# Altium PCB Sobel_FPGA_Block.PcbDoc
Units mil, origin at the board's own origin, x right, y up, seen from the top; angles counter-clockwise.
Board outline 6000 x 4000 mil, 6 copper layers (Top Layer, GND Plane, Power Plane, Inner Signal, GND Plane 2, Bottom Layer), stack 30.065 mil thick; 109 components, 53 nets, 617 pads, 0 vias.
Unrouted connection lines stored in the file: 370.
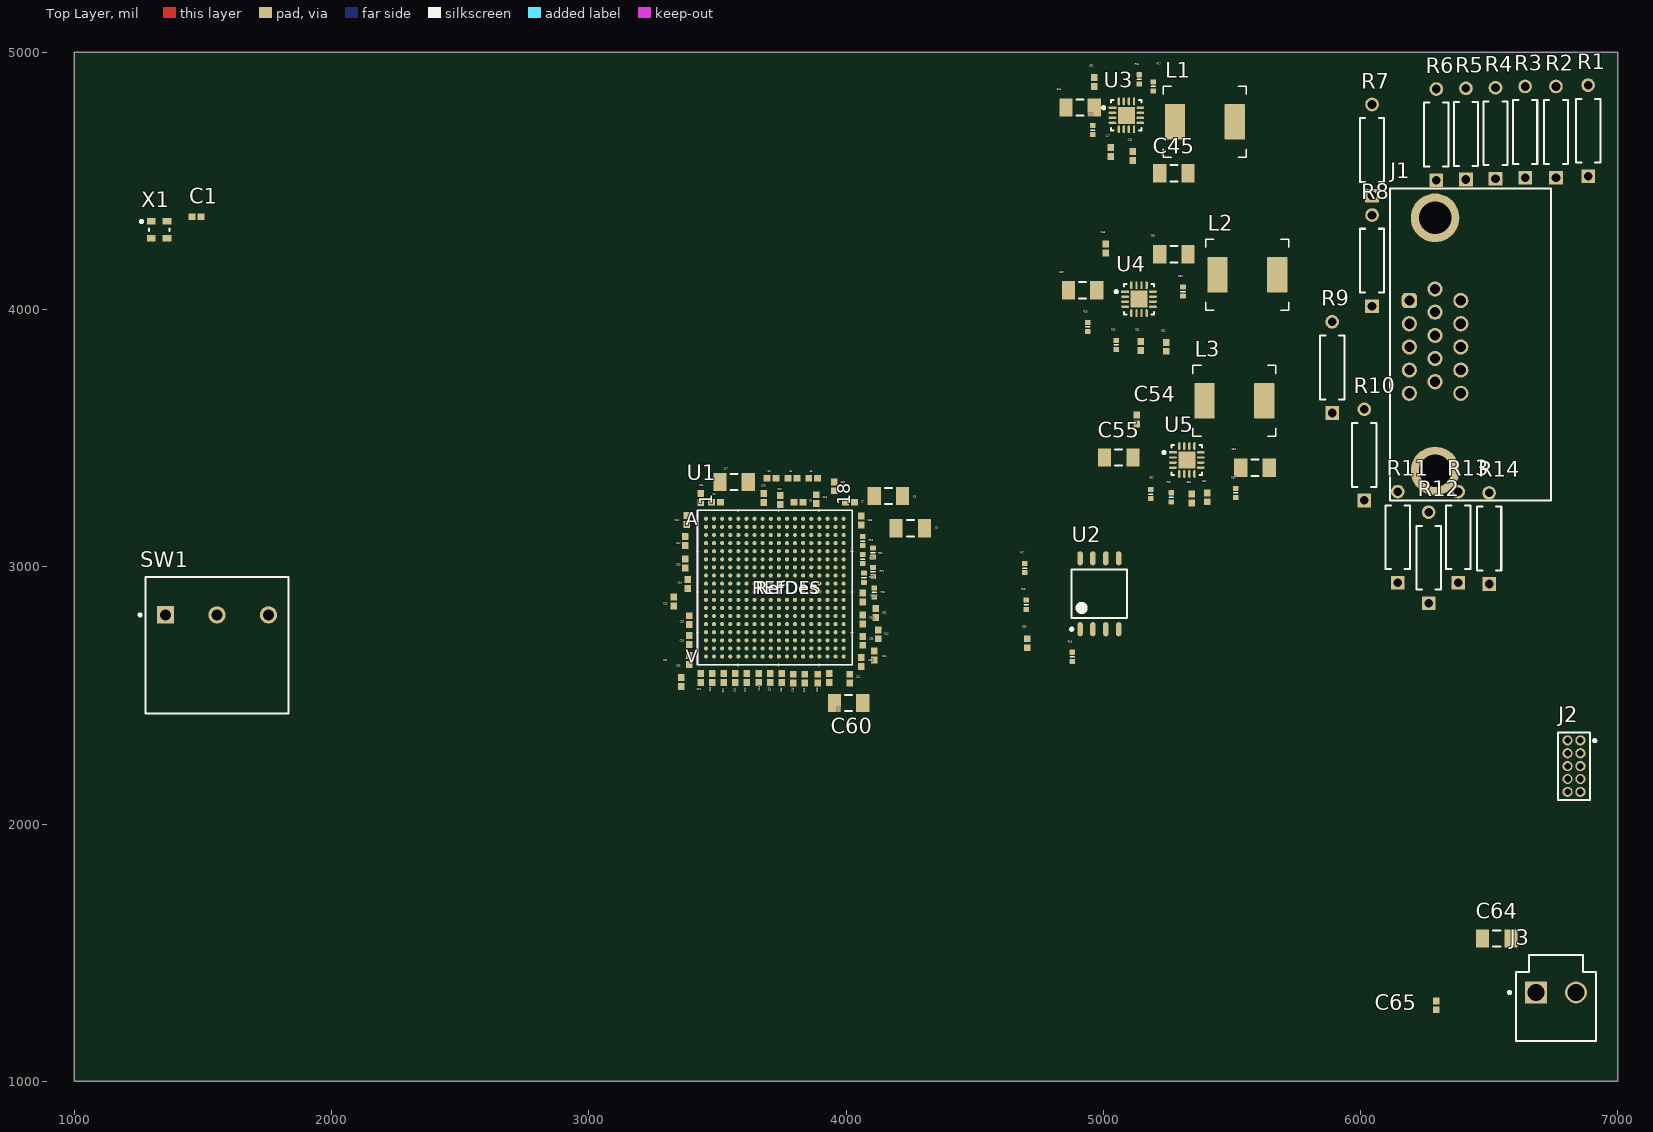
[diagram p0: Top Layer view]
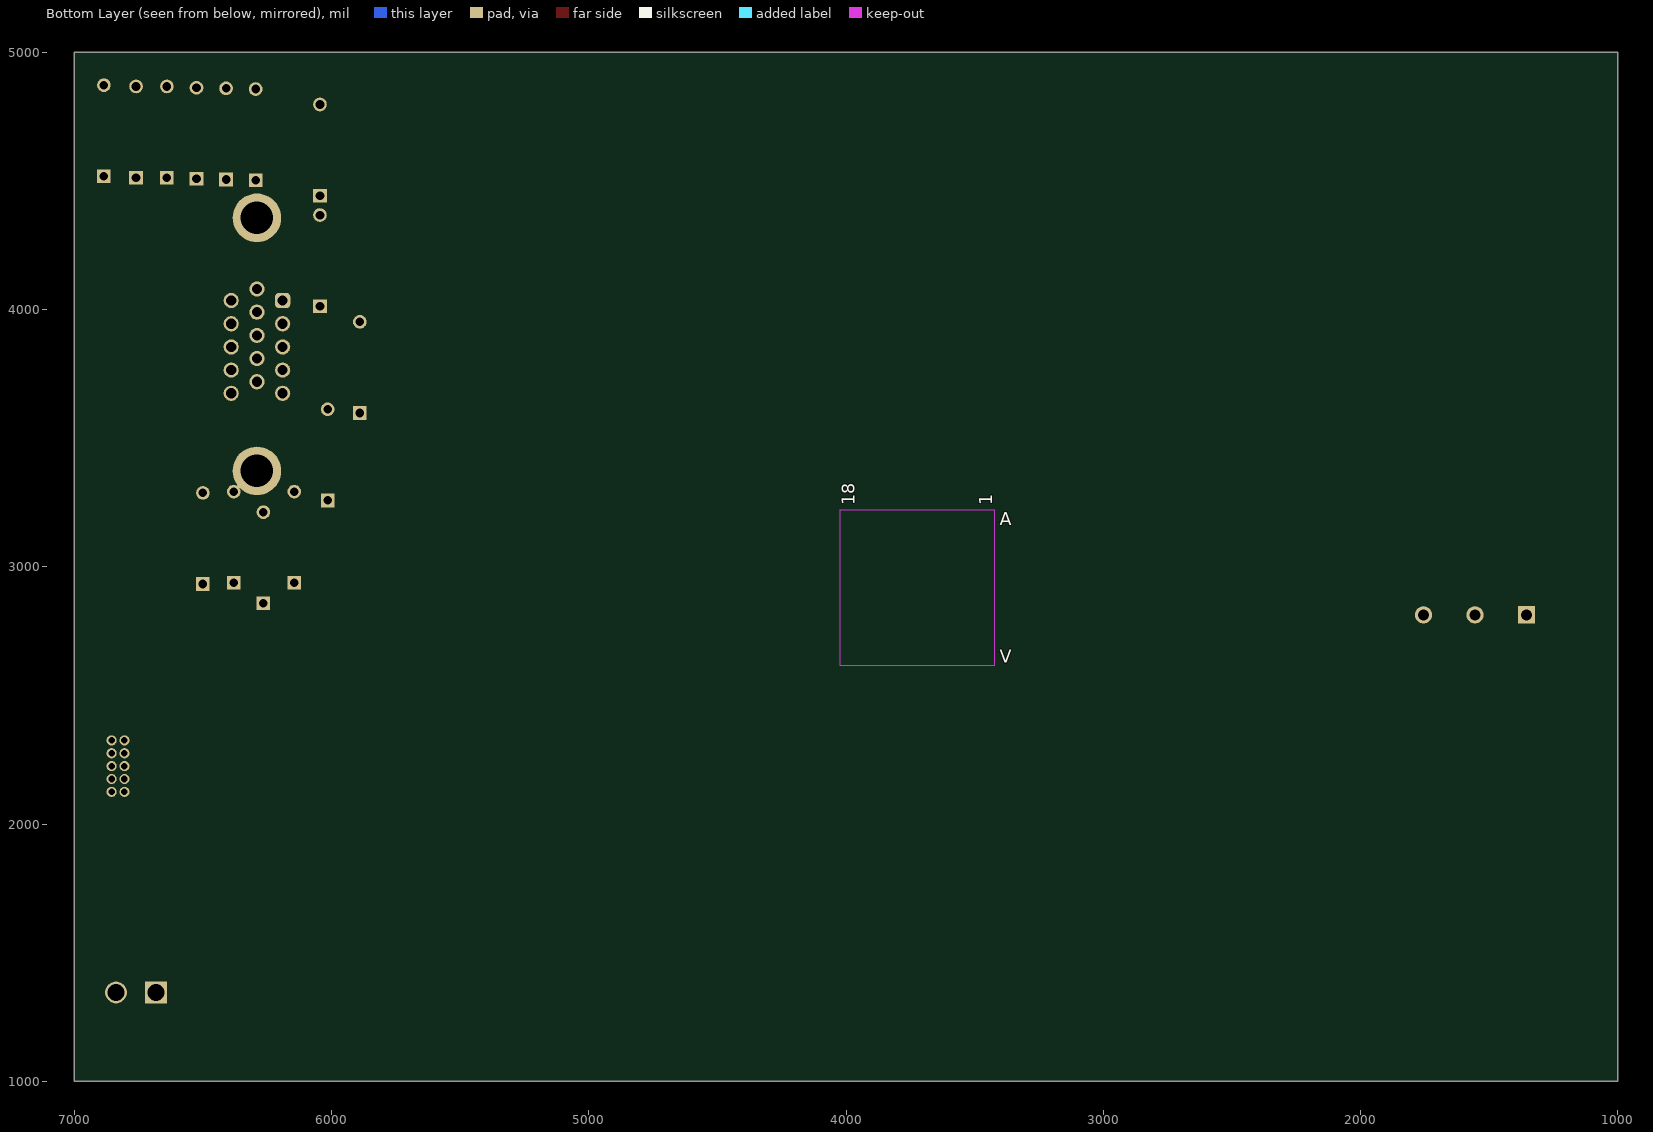
[diagram p1: Bottom Layer view, seen from below]
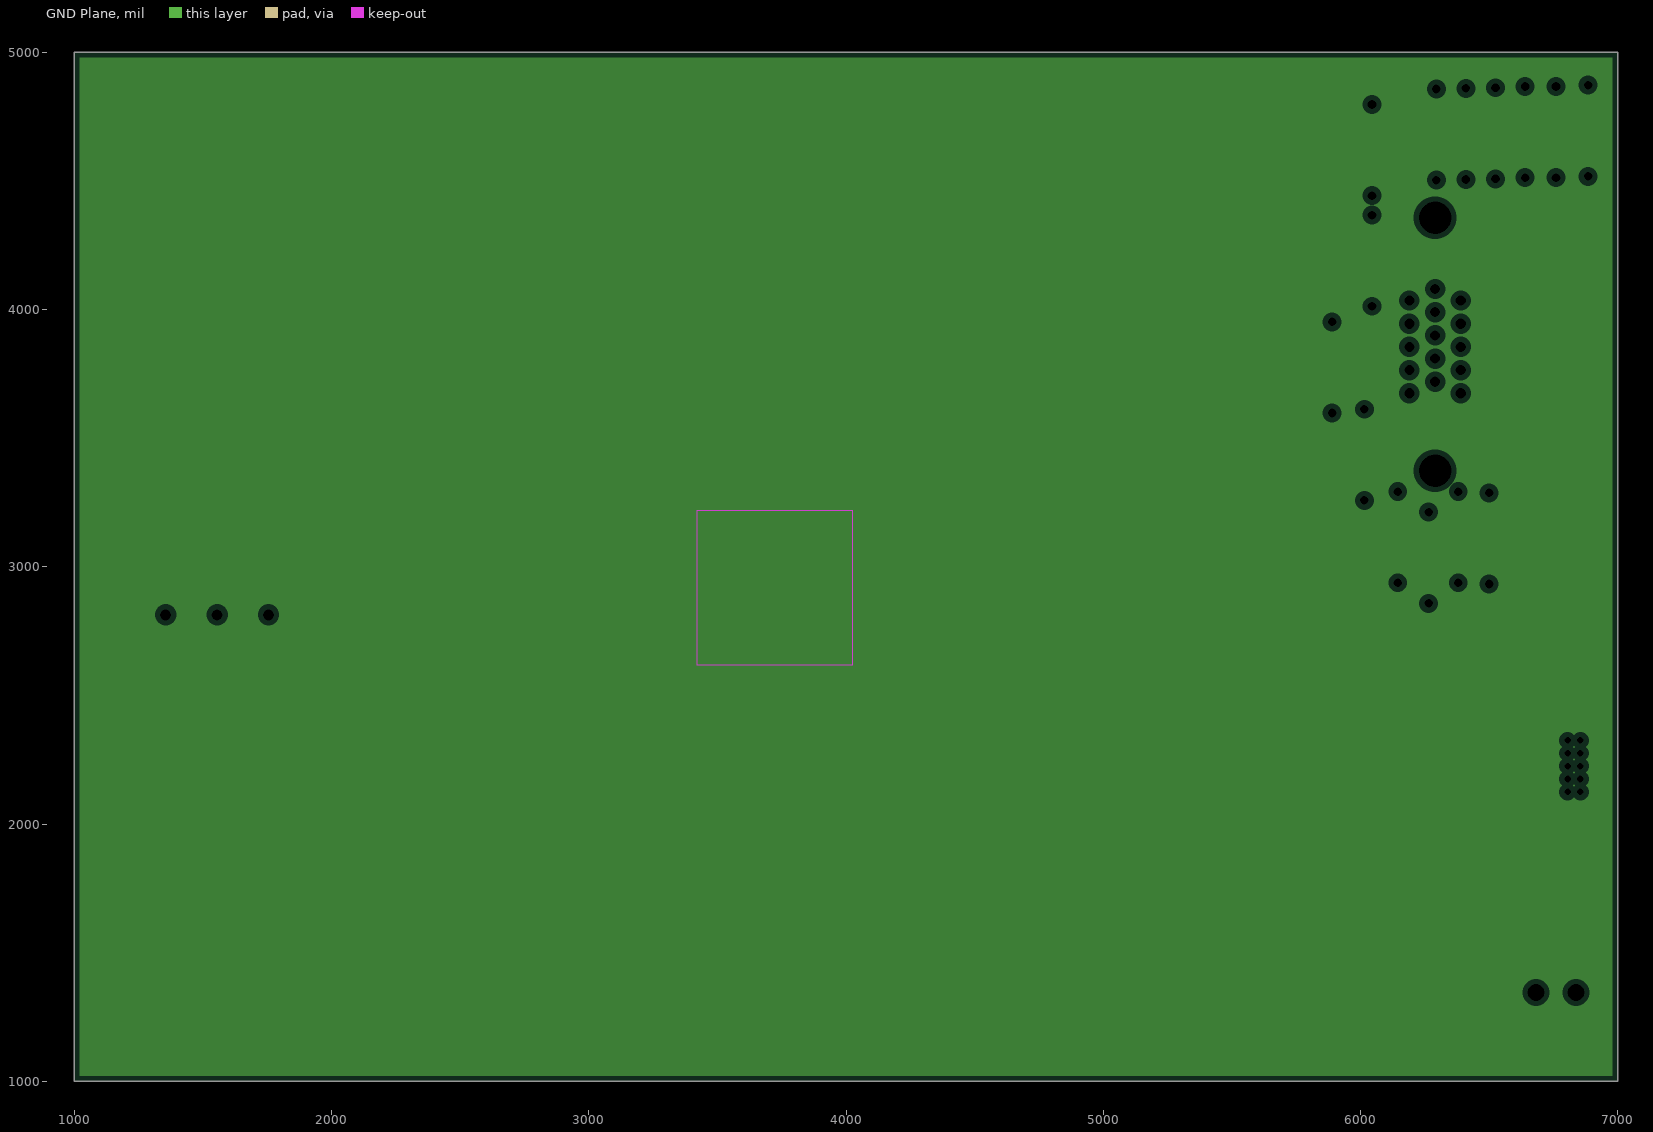
[diagram p2: GND Plane, clearances drawn from the general rule]
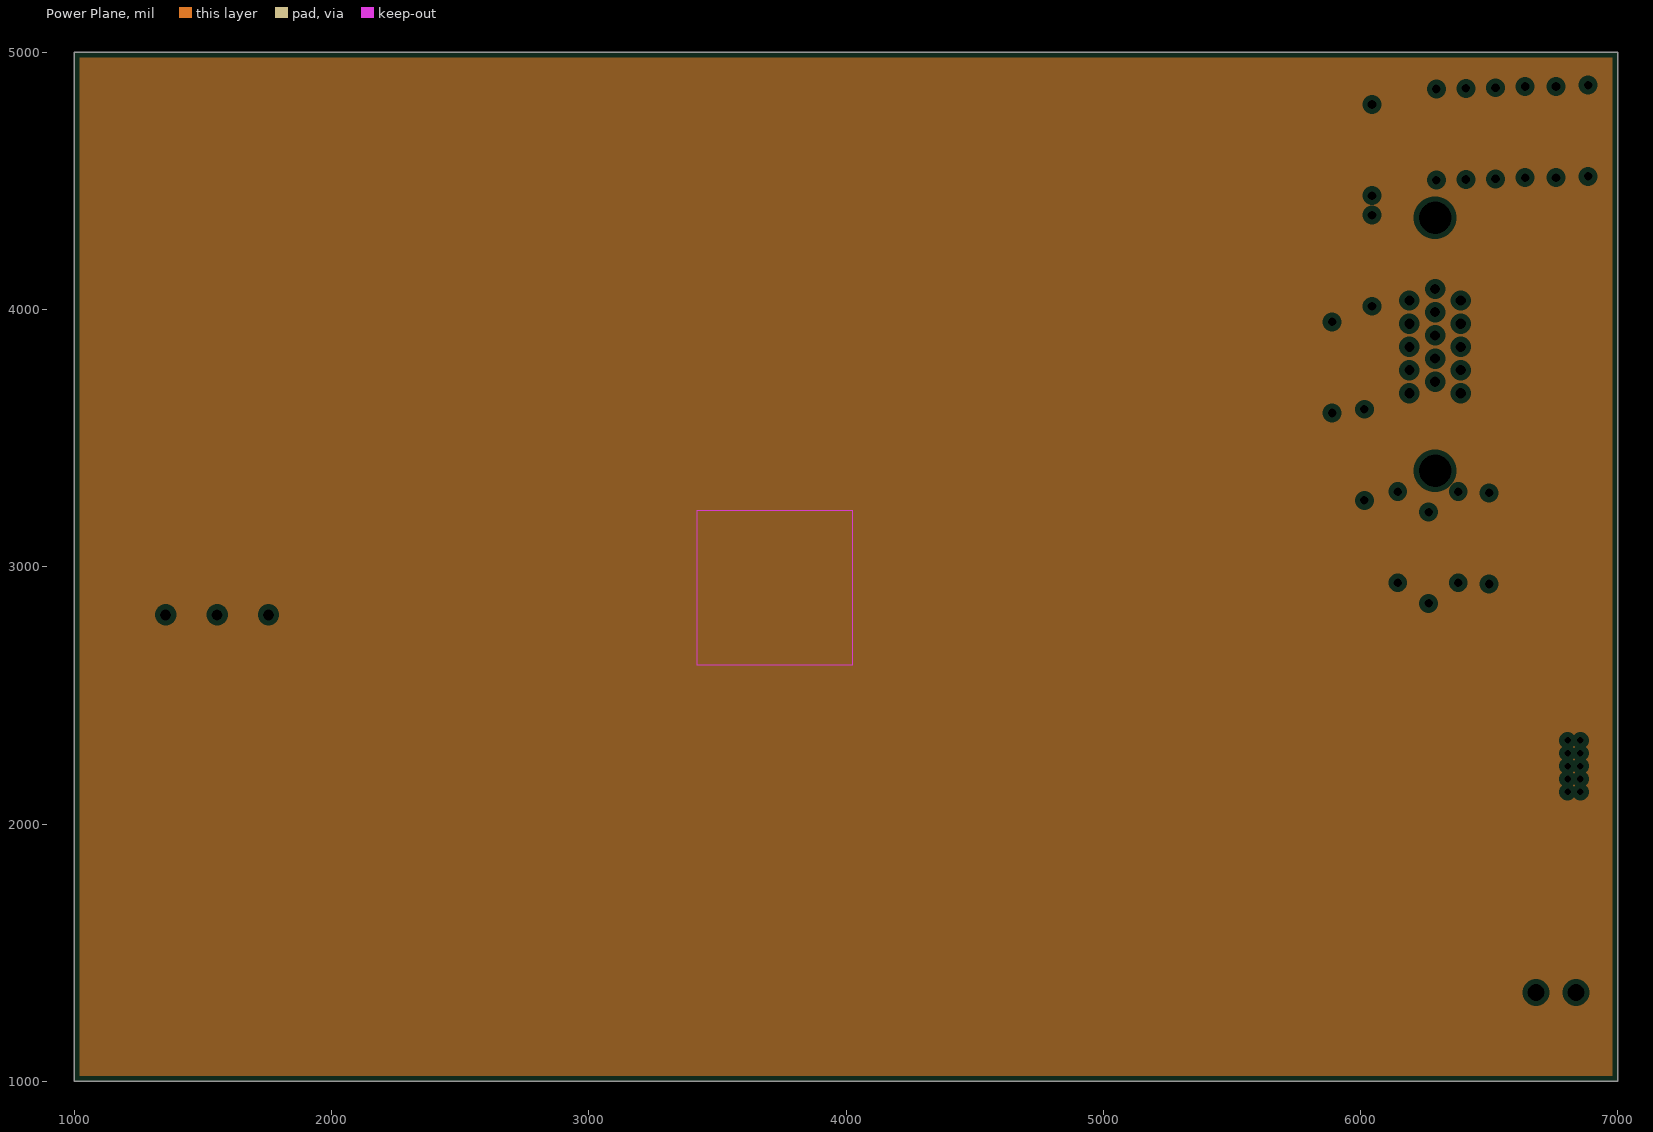
[diagram p3: Power Plane, clearances drawn from the general rule]
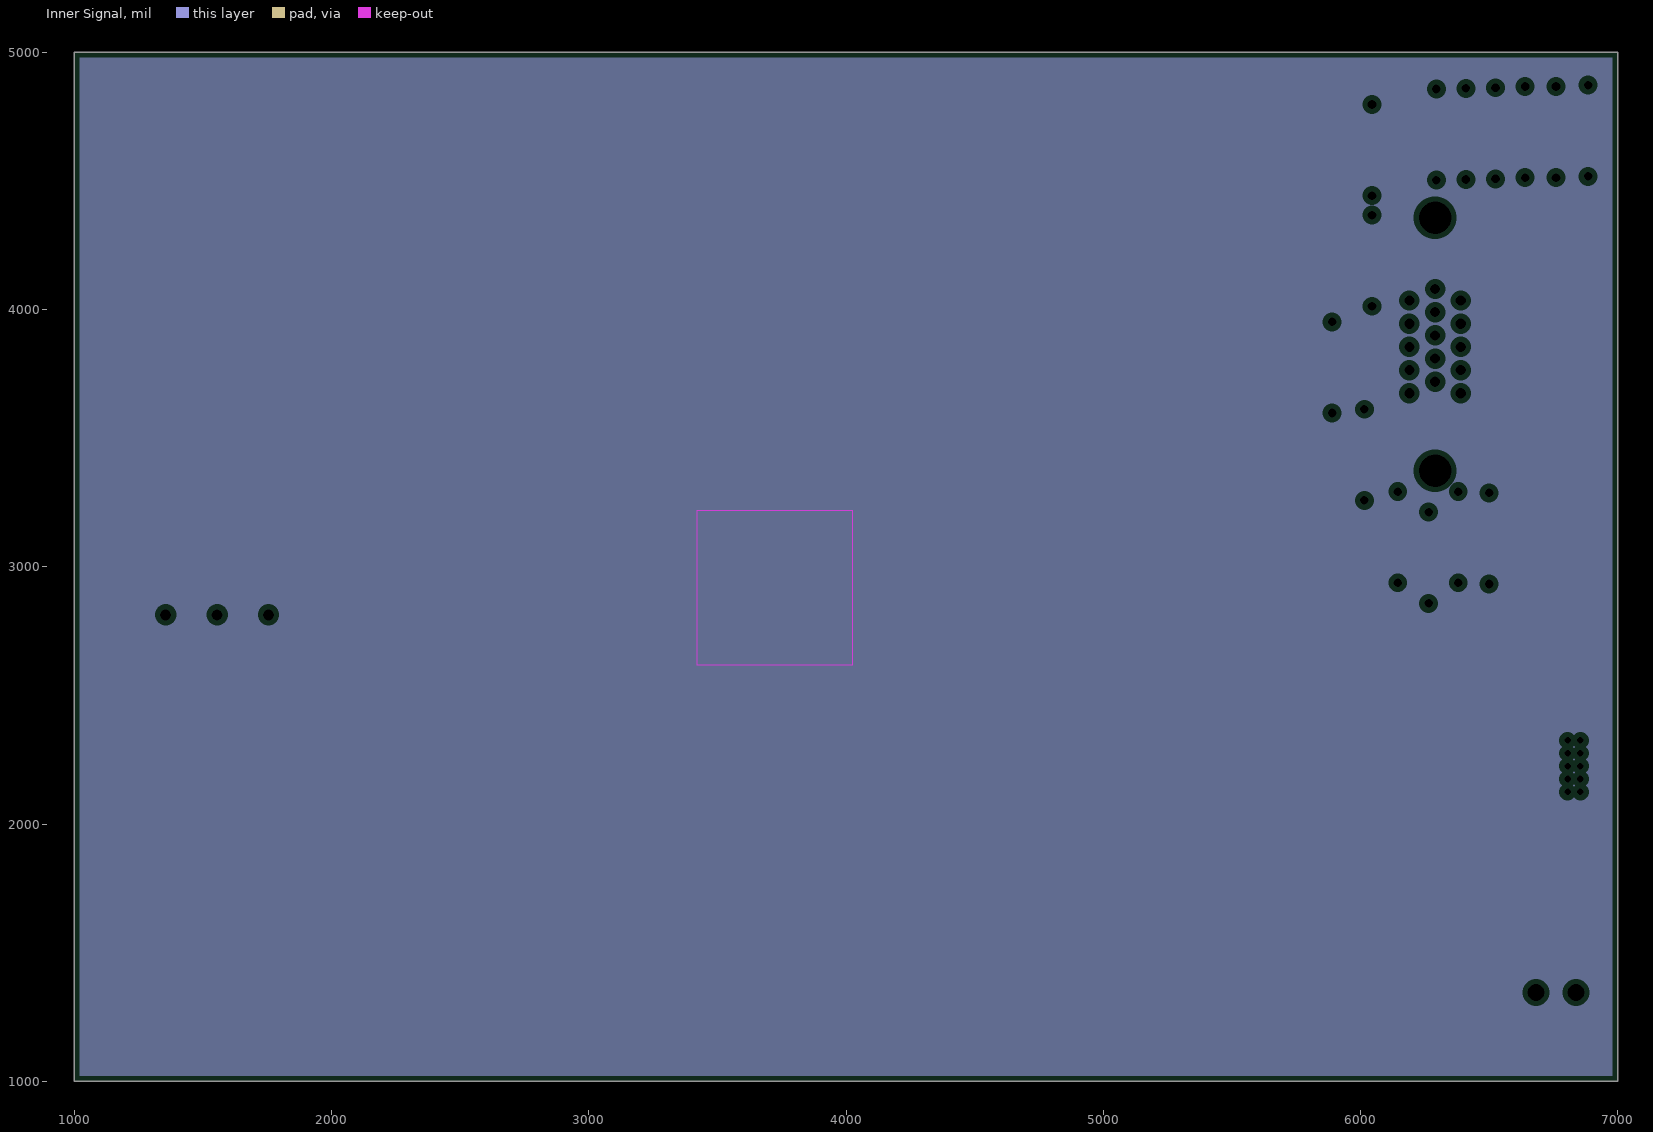
[diagram p4: Inner Signal, clearances drawn from the general rule]
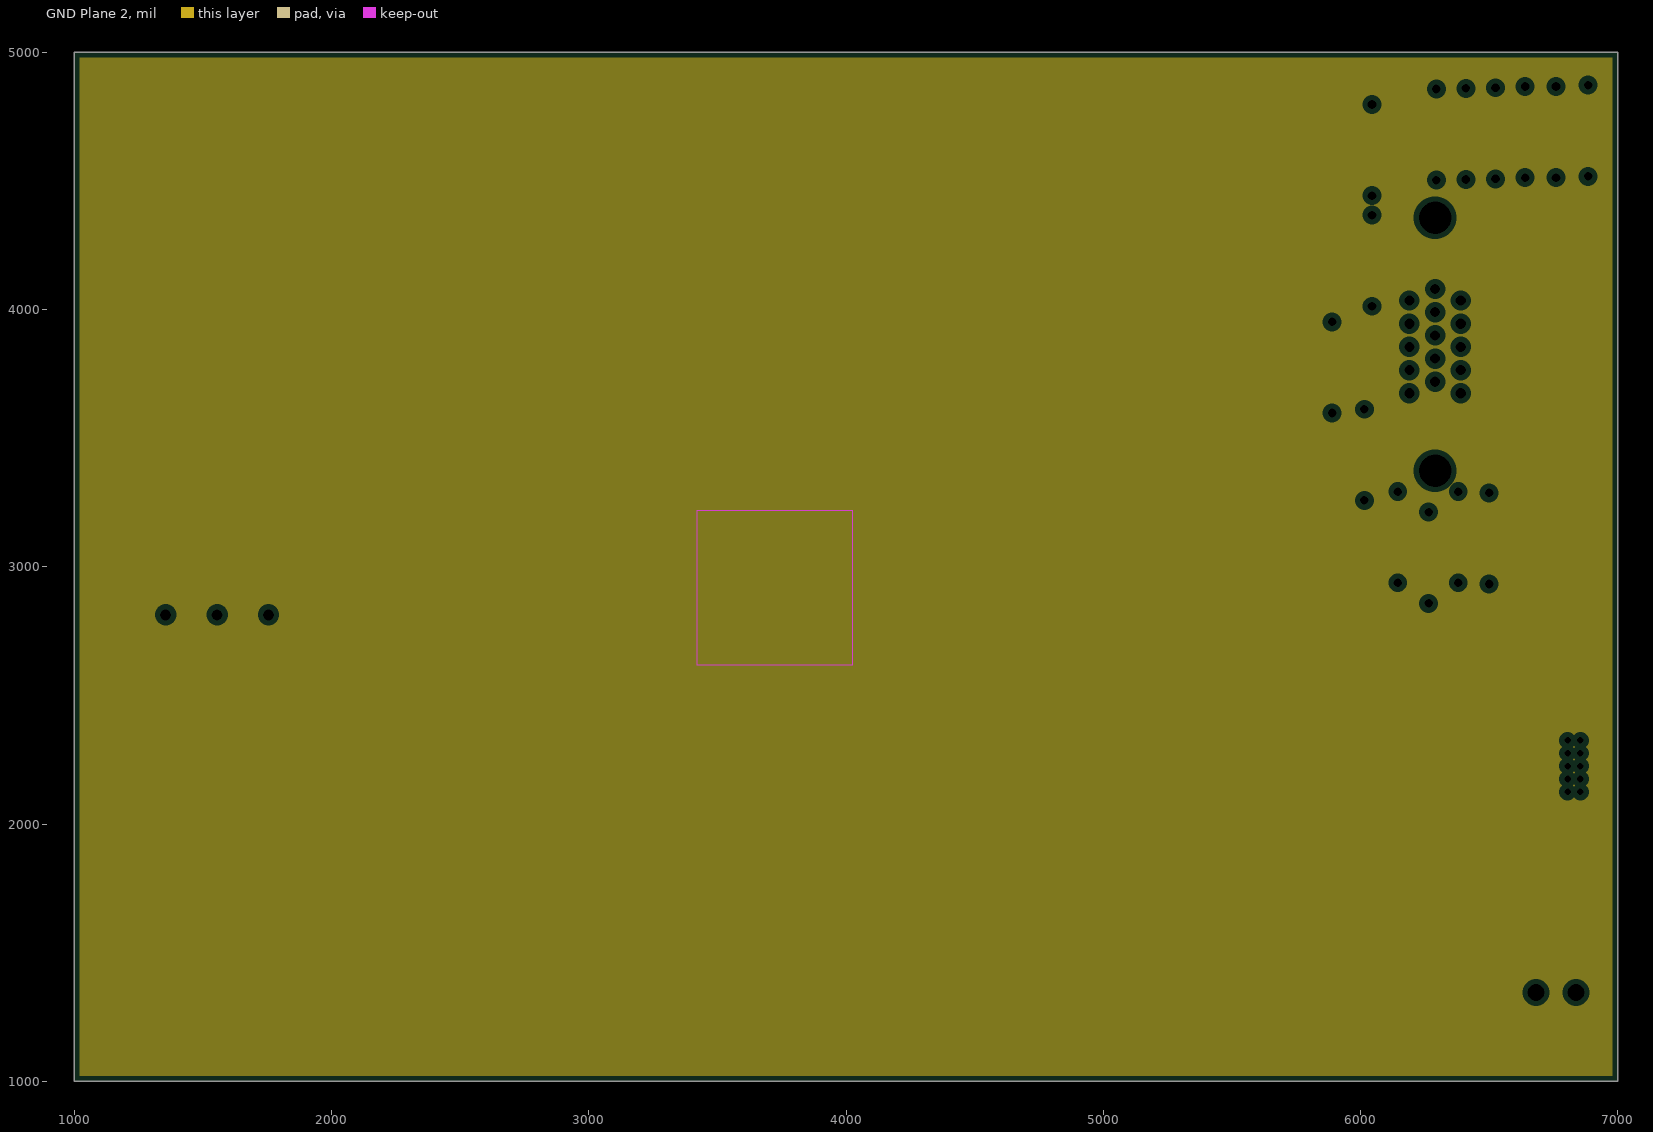
[diagram p5: GND Plane 2, clearances drawn from the general rule]

## Layer stack, top to bottom
Top Solder: solder mask 0.4, Solder Resist, Dk 3.5
Top Layer: signal copper 1.4
Dielectric 2: prepreg 2.8, PP-006, Dk 4.1
GND Plane: plane copper 1.378
Dielectric 3: prepreg 2.8, PP-006, Dk 4.1
Power Plane: plane copper 0.3543
Dielectric 1: dielectric 12.6, FR-4, Dk 4.8
Inner Signal: plane copper 0.3543
Dielectric 4: prepreg 2.8, PP-006, Dk 4.1
GND Plane 2: plane copper 1.378
Dielectric 5: prepreg 2.8, PP-006, Dk 4.1
Bottom Layer: signal copper 1.4
Bottom Solder: solder mask 0.4, Solder Resist, Dk 3.5

## Board outline
1000,1000 7000,1000 7000,5000 1000,5000

## Design rules (kind name [scope] priority, off if disabled: settings)
Clearance [All] p1: gap=10 ignorepadtopadclearanceinfootprint=FALSE
PlaneClearance [All] p1: clearance=20
PlaneConnect [All] p1: planeconnectstyle=Relief reliefexpansion=20 reliefentries=4 reliefconductorwidth=10 reliefairgap=10
PolygonConnect [All] p1: connectstyle=Relief reliefconductorwidth=10 reliefentries=4 polygonreliefangle="90 Angle" airgapwidth=10
RoutingVias [All] p1: holewidth=10 width=20 viastyle="Through Hole" minholewidth=8 minwidth=18 maxholewidth=12 maxwidth=24
SMDNeckDown [All] p1: percent=50.000
SolderMaskExpansion [All] p1: expansion=0 istentingtop=FALSE
SupplyNets "Schematic Supply Nets" [InNet('GND')] p1: voltage=0.000
Width [All] p1: maxlimit=10 minlimit=4 preferedwidth=10 toplayer_prefwidth=5 bottomlayer_minwidth=10 minimp=50.000000 maximp=50.000000 favimp=50.000000
28 further rules are at their usual default settings.

## Components (designator, comment, footprint, x,y, rotation, side; value= is the part's Value field where it differs from the comment)
C1 "Capacitor 6.8 nF +/- 10% 16 V 0402" CAPC1005X56X25NL10T15 1475,4360 r0 top value=100nF
C2 "Capacitor 6.8 nF +/- 10% 16 V 0402" CAPC1005X56X25NL10T15 3495,3250 r0 top value=100nF
C3 "Capacitor 6.8 nF +/- 10% 16 V 0402" CAPC1005X56X25NL10T15 3710,3345 r0 top value=100nF
C4 "Capacitor 6.8 nF +/- 10% 16 V 0402" CAPC1005X56X25NL10T15 3792.32,3345 r0 top value=100nF
C5 "Capacitor 6.8 nF +/- 10% 16 V 0402" CAPC1005X56X25NL10T15 3872.32,3345 r0 top value=100nF
C6 "Capacitor 6.8 nF +/- 10% 16 V 0402" CAPC1005X56X25NL10T15 3815,3250 r0 top value=100nF
C7 "Capacitor 6.8 nF +/- 10% 16 V 0402" CAPC1005X56X25NL10T15 4015,3250 r0 top value=100nF
C8 "Capacitor 10 uF +/- 10% 16 V 1206" CAPC3216X180X50NL20T25 4165,3275 r0 top value=4.7µF
C9 "Capacitor 10 uF +/- 10% 16 V 1206" CAPC3216X180X50NL20T25 4250.12,3150 r0 top value=10µF
C10 "Capacitor 6.8 nF +/- 10% 16 V 0402" CAPC1005X56X25NL10T15 3435,2567.32 r90 top value=100nF
C11 "Capacitor 6.8 nF +/- 10% 16 V 0402" CAPC1005X56X25NL10T15 3570,2567.32 r90 top value=100nF
C12 "Capacitor 6.8 nF +/- 10% 16 V 0402" CAPC1005X56X25NL10T15 3615,2567.32 r90 top value=100nF
C13 "Capacitor 6.8 nF +/- 10% 16 V 0402" CAPC1005X56X25NL10T15 3660,2567.32 r90 top value=100nF
C14 "Capacitor 6.8 nF +/- 10% 16 V 0402" CAPC1005X56X25NL10T15 3935,2567.32 r90 top value=100nF
C15 "Capacitor 6.8 nF +/- 10% 16 V 0402" CAPC1005X56X25NL10T15 3795,2565 r90 top value=100nF
C16 "Capacitor 6.8 nF +/- 10% 16 V 0402" CAPC1005X56X25NL10T15 3885,3262.68 r90 top value=100nF
C17 "Capacitor 10 uF +/- 10% 16 V 1206" CAPC3216X180X50NL20T25 3565,3330 r0 top value=4.7µF
C18 "Capacitor 6.8 nF +/- 10% 16 V 0402" CAPC1005X56X25NL10T15 3380,3182.32 r90 top value=100nF
C19 "Capacitor 6.8 nF +/- 10% 16 V 0402" CAPC1005X56X25NL10T15 3385,2932.68 r90 top value=100nF
C20 "Capacitor 6.8 nF +/- 10% 16 V 0402" CAPC1005X56X25NL10T15 3390,2792.32 r90 top value=100nF
C21 "Capacitor 6.8 nF +/- 10% 16 V 0402" CAPC1005X56X25NL10T15 3390,2637.32 r90 top value=100nF
C22 "Capacitor 6.8 nF +/- 10% 16 V 0402" CAPC1005X56X25NL10T15 3525,2567.32 r90 top value=100nF
C23 "Capacitor 6.8 nF +/- 10% 16 V 0402" CAPC1005X56X25NL10T15 3890,2565 r90 top value=100nF
C24 "Capacitor 6.8 nF +/- 10% 16 V 0402" CAPC1005X56X25NL10T15 3375,3100 r90 top value=100nF
C25 "Capacitor 6.8 nF +/- 10% 16 V 0402" CAPC1005X56X25NL10T15 3330,2865 r90 top value=100nF
C26 "Capacitor 6.8 nF +/- 10% 16 V 0402" CAPC1005X56X25NL10T15 3390,2715 r90 top value=100nF
C27 "Capacitor 6.8 nF +/- 10% 16 V 0402" CAPC1005X56X25NL10T15 3705,2567.32 r90 top value=100nF
C28 "Capacitor 6.8 nF +/- 10% 16 V 0402" CAPC1005X56X25NL10T15 3840,2565 r90 top value=100nF
C29 "Capacitor 6.8 nF +/- 10% 16 V 0402" CAPC1005X56X25NL10T15 3680,3267.68 r90 top value=100nF
C30 "Capacitor 6.8 nF +/- 10% 16 V 0402" CAPC1005X56X25NL10T15 3375,3012.68 r90 top value=100nF
C31 "Capacitor 6.8 nF +/- 10% 16 V 0402" CAPC1005X56X25NL10T15 3435,3267.68 r90 top value=100nF
C32 "Capacitor 6.8 nF +/- 10% 16 V 0402" CAPC1005X56X25NL10T15 3955,3312.68 r90 top value=100nF
C33 "Capacitor 6.8 nF +/- 10% 16 V 0402" CAPC1005X56X25NL10T15 3750,2567.32 r90 top value=100nF
C34 "Capacitor 6.8 nF +/- 10% 16 V 0402" CAPC1005X56X25NL10T15 4065,2795 r90 top value=100nF
C35 "Capacitor 6.8 nF +/- 10% 16 V 0402" CAPC1005X56X25NL10T15 4065,2712.32 r90 top value=100nF
C36 "Capacitor 6.8 nF +/- 10% 16 V 0402" CAPC1005X56X25NL10T15 4060,2630 r90 top value=100nF
C37 "Capacitor 6.8 nF +/- 10% 16 V 0402" CAPC1005X56X25NL10T15 3745,3260 r90 top value=100nF
C38 "Capacitor 6.8 nF +/- 10% 16 V 0402" CAPC1005X56X25NL10T15 4060,3180 r90 top value=100nF
C39 "Capacitor 6.8 nF +/- 10% 16 V 0402" CAPC1005X56X25NL10T15 4065,2880 r90 top value=100nF
C40 "Capacitor 6.8 nF +/- 10% 16 V 0402" CAPC1005X56X25NL10T15 4125,2737.32 r90 top value=100nF
C41 "Capacitor 6.8 nF +/- 10% 16 V 0402" CAPC1005X56X25NL10T15 4110,2655 r90 top value=100nF
C42 "Capacitor 6.8 nF +/- 10% 16 V 0402" CAPC1005X56X25NL10T15 4015,2565 r90 top value=100nF
C44 "Capacitor 10 uF +/- 10% 16 V 1206" CAPC3216X180X50NL20T25 4910,4785 r0 top value=10µF
C45 "Capacitor 10 uF +/- 10% 16 V 1206" CAPC3216X180X50NL20T25 5275,4530 r0 top value=22µF
C46 "Capacitor 6.8 nF +/- 10% 16 V 0402" CAPC1005X56X25NL10T15 5115,4597.32 r90 top value=100nF
C47 "Capacitor 6.8 nF +/- 10% 16 V 0402" CAPC1005X56X25NL10T15 5030,4612.32 r90 top value=3.3nF
C48 "Capacitor 6.8 nF +/- 10% 16 V 0402" CAPC1005X56X25NL10T15 5010,4237.68 r90 top value=100nF
C49 "Capacitor 10 uF +/- 10% 16 V 1206" CAPC3216X180X50NL20T25 4919.88,4075 r0 top value=10µF
C50 "Capacitor 10 uF +/- 10% 16 V 1206" CAPC3216X180X50NL20T25 5275,4215 r0 top value=22µF
C51 "Capacitor 6.8 nF +/- 10% 16 V 0402" CAPC1005X56X25NL10T15 5245,3855 r90 top value=100nF
C52 "Capacitor 6.8 nF +/- 10% 16 V 0402" CAPC1005X56X25NL10T15 5145,3857.68 r90 top value=3.3nF
C53 "Capacitor 10 uF +/- 10% 16 V 1206" CAPC3216X180X50NL20T25 5590,3385 r0 top value=22µF
C54 "Capacitor 6.8 nF +/- 10% 16 V 0402" CAPC1005X56X25NL10T15 5130,3572.68 r90 top value=100nF
C55 "Capacitor 10 uF +/- 10% 16 V 1206" CAPC3216X180X50NL20T25 5060,3425 r0 top value=10µF
C56 "Capacitor 6.8 nF +/- 10% 16 V 0402" CAPC1005X56X25NL10T15 5345,3265 r90 top value=3.3nF
C57 "Capacitor 6.8 nF +/- 10% 16 V 0402" CAPC1005X56X25NL10T15 5405,3270 r90 top value=100nF
C59 "Capacitor 6.8 nF +/- 10% 16 V 0402" CAPC1005X56X25NL10T15 4705,2702.68 r90 top value=100nF
C60 "Capacitor 10 uF +/- 10% 16 V 1206" CAPC3216X180X50NL20T25 4009.88,2470 r0 top value=4.7µF
C61 "Capacitor 6.8 nF +/- 10% 16 V 0402" CAPC1005X56X25NL10T15 4115,2820 r90 top value=100nF
C62 "Capacitor 6.8 nF +/- 10% 16 V 0402" CAPC1005X56X25NL10T15 4965,4885 r90 top value=100nF
C63 "Capacitor 6.8 nF +/- 10% 16 V 0402" CAPC1005X56X25NL10T15 3360,2552.32 r90 top value=100nF
C64 "Capacitor 10 uF +/- 10% 16 V 1206" CAPC3216X180X50NL20T25 6530,1555 r0 top value=47µF
C65 "Capacitor 6.8 nF +/- 10% 16 V 0402" CAPC1005X56X25NL10T15 6295,1295 r90 top value=100nF
C66 "Capacitor 6.8 nF +/- 10% 16 V 0402" CAPC1005X56X25NL10T15 3480,2567.32 r90 top value=100nF
J1 "618015325223" 618015325223 6427.01,3864.68 r90 top
J2 "62201021821" 62201021821 6830,2225 r90 top
J3 "B2P-VH(LF)(SN)" JST-B2P-VH(LF)(SN)_V 6760,1290 r0 top
L1 "PCMB063T-2R2MS" SUSUMU-PCMB063T_V 5395,4730 r0 top value=2.2µH
L2 "PCMB063T-2R2MS" SUSUMU-PCMB063T_V 5560,4135 r0 top value=2.2µH
L3 "PCMB063T-2R2MS" SUSUMU-PCMB063T_V 5510,3645 r0 top value=2.2µH
R1 "MFR-25FBF52-475R" RESA60-630X240 6885,4695 r90 top value=4k
R2 "MFR-25FBF52-475R" RESA60-630X240 6760,4690 r90 top value=2k
R3 "MFR-25FBF52-475R" RESA60-630X240 6640,4690 r90 top value=1k
R4 "MFR-25FBF52-475R" RESA60-630X240 6525,4685 r90 top value=510R
R5 "MFR-25FBF52-475R" RESA60-630X240 6410,4682.83 r90 top value=4k
R6 "MFR-25FBF52-475R" RESA60-630X240 6295,4680 r90 top value=2k
R7 "MFR-25FBF52-475R" RESA60-630X240 6045,4620 r90 top value=1k
R8 "MFR-25FBF52-475R" RESA60-630X240 6045,4190 r90 top value=510R
R9 "MFR-25FBF52-475R" RESA60-630X240 5890,3775 r90 top value=4k
R10 "MFR-25FBF52-475R" RESA60-630X240 6015,3435 r90 top value=2k
R11 "MFR-25FBF52-475R" RESA60-630X240 6145,3115 r90 top value=1k
R12 "MFR-25FBF52-475R" RESA60-630X240 6265,3035 r90 top value=510R
R13 "MFR-25FBF52-475R" RESA60-630X240 6380,3115 r90 top value=100R
R14 "MFR-25FBF52-475R" RESA60-630X240 6500,3110 r90 top value=100R
R16 "84D5KR2F" RESC0402(1005)_L 4880,2650 r90 top value=4.7k
R17 "84D5KR2F" RESC0402(1005)_L 4695,2995 r90 top value=4.7k
R18 "84D5KR2F" RESC0402(1005)_L 4700,2852.28 r90 top value=4.7k
R19 "84D5KR2F" RESC0402(1005)_L 4070,2957.28 r90 top value=4.7k
R20 "84D5KR2F" RESC0402(1005)_L 4110,2900 r90 top value=4.7k
R21 "84D5KR2F" RESC0402(1005)_L 4105,2980 r90 top value=4.7k
R22 "84D5KR2F" RESC0402(1005)_L 4105,3055 r90 top value=4.7k
R23 "84D5KR2F" RESC0402(1005)_L 4065,3100 r90 top value=4.7k
R24 "84D5KR2F" RESC0402(1005)_L 4065,3030 r90 top value=4.7k
R25 "84D5KR2F" RESC0402(1005)_L 4960,4697.72 r90 top value=24.9k
R26 "84D5KR2F" RESC0402(1005)_L 5140,4895 r90 top value=100k
R27 "84D5KR2F" RESC0402(1005)_L 5195,4867.28 r90 top value=100k
R28 "84D5KR2F" RESC0402(1005)_L 4940,3932.28 r90 top value=125k
R29 "84D5KR2F" RESC0402(1005)_L 5050,3862.28 r90 top value=100k
R30 "84D5KR2F" RESC0402(1005)_L 5310,4070 r90 top value=100k
R31 "84D5KR2F" RESC0402(1005)_L 5265,3270 r90 top value=100k
R32 "84D5KR2F" RESC0402(1005)_L 5185,3282.28 r90 top value=312k
R33 "84D5KR2F" RESC0402(1005)_L 5515,3287.28 r90 top value=100k
SW1 "25536NA6" FP-25536NA6-0 1555,2695 r0 top
U1 "XC7A100T-1CSG324C" CSG324_XIL 3723.23,2918.78 r0 top
U2 "MT25QL128ABA1ESE-0SIT" MICT-SE-8_L 4985,2895 r90 top
U3 "TPS62130ARGTR" FP-RGT0016C-IPC_C 5090,4755 r0 top
U4 "TPS62130ARGTR" FP-RGT0016C-IPC_C 5139.06,4040.16 r0 top
U5 "TPS62130ARGTR" FP-RGT0016C-IPC_C 5325,3415 r0 top
X1 "DSC1001DL5-100.0000T" FP-CDFN2520-4LD-PL-1-MFG 1330,4310 r0 top

## Footprints (in the part's own frame and the unit in brackets; to place one, negate y for a bottom-side part, rotate by r counter-clockwise, add the part's x,y. Pads: shape width x height; smd on the part's side, far side on the other; paste and mask are expansions set on the pad)
62201021821 [mm] "Socket Header, Pitch 1.27 mm, THT, Vertical, dual row, 10p"
  round 1 hole 0.65: 1(2.54,-0.635) 2(2.54,0.635) 3(1.27,-0.635) 4(1.27,0.635) 5(0,-0.635) 6(0,0.635) 7(-1.27,-0.635) 8(-1.27,0.635) 9(-2.54,-0.635) 10(-2.54,0.635)
  silkscreen extent -3.32,-2.18 3.32,1.6, body extent -3.37,-1.5 3.38,1.5, height 4.55
618015325223 [mm] "15 pins, right angled with Rivet"
  rrect50% 1.5x1.5 hole 1: 1(4.326,6.02)
  round 1.5 hole 1: 2(2.036,6.02) 3(-0.254,6.02) 4(-2.544,6.02) 5(-4.834,6.02) 6(5.466,3.48) 7(3.176,3.48) 8(0.886,3.48) 9(-1.404,3.48) 10(-3.694,3.48) 11(4.326,0.94) 12(2.036,0.94) 13(-0.254,0.94) 14(-2.544,0.94) 15(-4.834,0.94)
  round 4.8 hole 3.2: M1(-12.495,3.48) M2(12.495,3.48)
  silkscreen extent -15.4,-7.95 15.4,7.95, body extent -15.4,-13.85 15.4,7.95, height 12.55
CAPC1005X56X25NL10T15 [mm] "Chip Capacitor, 2-Leads, Body 1.10x0.60mm, IPC Medium Density"
  rect 0.68x0.64 smd: 1(-0.44,0) 2(0.44,0)
  body extent -0.55,-0.3 0.55,0.3, height 0.56
CAPC3216X180X50NL20T25 [mm] "Chip Capacitor, 2-Leads, Body 3.40x1.80mm, IPC Medium Density"
  rect 1.3x1.8 smd: 1(-1.4,0) 2(1.4,0)
  silkscreen extent -0.35,-0.8 0.35,0.8, body extent -1.7,-0.9 1.7,0.9, height 1.8
CSG324_XIL [mil]
  round 16 smd paste+0 mask+0: A1(-267.72,267.72) A2(-236.22,267.72) A3(-204.72,267.72) A4(-173.23,267.72) A5(-141.73,267.72) A6(-110.24,267.72) A7(-78.74,267.72) A8(-47.24,267.72) A9(-15.75,267.72) A10(15.75,267.72) A11(47.24,267.72) A12(78.74,267.72) A13(110.24,267.72) A14(141.73,267.72) A15(173.23,267.72) A16(204.72,267.72) A17(236.22,267.72) A18(267.72,267.72) B1(-267.72,236.22) B2(-236.22,236.22) B3(-204.72,236.22) B4(-173.23,236.22) B5(-141.73,236.22) B6(-110.24,236.22) B7(-78.74,236.22) B8(-47.24,236.22) B9(-15.75,236.22) B10(15.75,236.22) B11(47.24,236.22) B12(78.74,236.22) B13(110.24,236.22) B14(141.73,236.22) B15(173.23,236.22) B16(204.72,236.22) B17(236.22,236.22) B18(267.72,236.22) C1(-267.72,204.72) C2(-236.22,204.72) C3(-204.72,204.72) C4(-173.23,204.72) C5(-141.73,204.72) C6(-110.24,204.72) C7(-78.74,204.72) C8(-47.24,204.72) C9(-15.75,204.72) C10(15.75,204.72) C11(47.24,204.72) C12(78.74,204.72) C13(110.24,204.72) C14(141.73,204.72) C15(173.23,204.72) C16(204.72,204.72) C17(236.22,204.72) C18(267.72,204.72) D1(-267.72,173.23) D2(-236.22,173.23) D3(-204.72,173.23) D4(-173.23,173.23) D5(-141.73,173.23) D6(-110.24,173.23) D7(-78.74,173.23) D8(-47.24,173.23) D9(-15.75,173.23) D10(15.75,173.23) D11(47.24,173.23) D12(78.74,173.23) D13(110.24,173.23) D14(141.73,173.23) D15(173.23,173.23) D16(204.72,173.23) D17(236.22,173.23) D18(267.72,173.23) E1(-267.72,141.73) E2(-236.22,141.73) E3(-204.72,141.73) E4(-173.23,141.73) E5(-141.73,141.73) E6(-110.24,141.73) E7(-78.74,141.73) E8(-47.24,141.73) E9(-15.75,141.73) E10(15.75,141.73) E11(47.24,141.73) E12(78.74,141.73) E13(110.24,141.73) E14(141.73,141.73) E15(173.23,141.73) E16(204.72,141.73) E17(236.22,141.73) E18(267.72,141.73) F1(-267.72,110.24) F2(-236.22,110.24) F3(-204.72,110.24) F4(-173.23,110.24) F5(-141.73,110.24) F6(-110.24,110.24) F7(-78.74,110.24) F8(-47.24,110.24) F9(-15.75,110.24) F10(15.75,110.24) F11(47.24,110.24) F12(78.74,110.24) F13(110.24,110.24) F14(141.73,110.24) F15(173.23,110.24) F16(204.72,110.24) F17(236.22,110.24) F18(267.72,110.24) G1(-267.72,78.74) G2(-236.22,78.74) G3(-204.72,78.74) G4(-173.23,78.74) G5(-141.73,78.74) G6(-110.24,78.74) G7(-78.74,78.74) G8(-47.24,78.74) G9(-15.75,78.74) G10(15.75,78.74) G11(47.24,78.74) G12(78.74,78.74) G13(110.24,78.74) G14(141.73,78.74) G15(173.23,78.74) G16(204.72,78.74) G17(236.22,78.74) G18(267.72,78.74) H1(-267.72,47.24) H2(-236.22,47.24) H3(-204.72,47.24) H4(-173.23,47.24) H5(-141.73,47.24) H6(-110.24,47.24) H7(-78.74,47.24) H8(-47.24,47.24) H9(-15.75,47.24) H10(15.75,47.24) H11(47.24,47.24) H12(78.74,47.24) H13(110.24,47.24) H14(141.73,47.24) H15(173.23,47.24) H16(204.72,47.24) H17(236.22,47.24) H18(267.72,47.24) J1(-267.72,15.75) J2(-236.22,15.75) J3(-204.72,15.75) J4(-173.23,15.75) J5(-141.73,15.75) J6(-110.24,15.75) J7(-78.74,15.75) J8(-47.24,15.75) J9(-15.75,15.75) J10(15.75,15.75) J11(47.24,15.75) J12(78.74,15.75) J13(110.24,15.75) J14(141.73,15.75) J15(173.23,15.75) J16(204.72,15.75) J17(236.22,15.75) J18(267.72,15.75) K1(-267.72,-15.75) K2(-236.22,-15.75) K3(-204.72,-15.75) K4(-173.23,-15.75) K5(-141.73,-15.75) K6(-110.24,-15.75) K7(-78.74,-15.75) K8(-47.24,-15.75) K9(-15.75,-15.75) K10(15.75,-15.75) K11(47.24,-15.75) K12(78.74,-15.75) K13(110.24,-15.75) K14(141.73,-15.75) K15(173.23,-15.75) K16(204.72,-15.75) K17(236.22,-15.75) K18(267.72,-15.75) L1(-267.72,-47.24) L2(-236.22,-47.24) L3(-204.72,-47.24) L4(-173.23,-47.24) L5(-141.73,-47.24) L6(-110.24,-47.24) L7(-78.74,-47.24) L8(-47.24,-47.24) L9(-15.75,-47.24) L10(15.75,-47.24) L11(47.24,-47.24) L12(78.74,-47.24) L13(110.24,-47.24) L14(141.73,-47.24) L15(173.23,-47.24) L16(204.72,-47.24) L17(236.22,-47.24) L18(267.72,-47.24) M1(-267.72,-78.74) M2(-236.22,-78.74) M3(-204.72,-78.74) M4(-173.23,-78.74) M5(-141.73,-78.74) M6(-110.24,-78.74) M7(-78.74,-78.74) M8(-47.24,-78.74) M9(-15.75,-78.74) M10(15.75,-78.74) M11(47.24,-78.74) M12(78.74,-78.74) M13(110.24,-78.74) M14(141.73,-78.74) M15(173.23,-78.74) M16(204.72,-78.74) M17(236.22,-78.74) M18(267.72,-78.74) N1(-267.72,-110.24) N2(-236.22,-110.24) N3(-204.72,-110.24) N4(-173.23,-110.24) N5(-141.73,-110.24) N6(-110.24,-110.24) N7(-78.74,-110.24) N8(-47.24,-110.24) N9(-15.75,-110.24) N10(15.75,-110.24) N11(47.24,-110.24) N12(78.74,-110.24) N13(110.24,-110.24) N14(141.73,-110.24) N15(173.23,-110.24) N16(204.72,-110.24) N17(236.22,-110.24) N18(267.72,-110.24) P1(-267.72,-141.73) P2(-236.22,-141.73) P3(-204.72,-141.73) P4(-173.23,-141.73) P5(-141.73,-141.73) P6(-110.24,-141.73) P7(-78.74,-141.73) P8(-47.24,-141.73) P9(-15.75,-141.73) P10(15.75,-141.73) P11(47.24,-141.73) P12(78.74,-141.73) P13(110.24,-141.73) P14(141.73,-141.73) P15(173.23,-141.73) P16(204.72,-141.73) P17(236.22,-141.73) P18(267.72,-141.73) R1(-267.72,-173.23) R2(-236.22,-173.23) R3(-204.72,-173.23) R4(-173.23,-173.23) R5(-141.73,-173.23) R6(-110.24,-173.23) R7(-78.74,-173.23) R8(-47.24,-173.23) R9(-15.75,-173.23) R10(15.75,-173.23) R11(47.24,-173.23) R12(78.74,-173.23) R13(110.24,-173.23) R14(141.73,-173.23) R15(173.23,-173.23) R16(204.72,-173.23) R17(236.22,-173.23) R18(267.72,-173.23) T1(-267.72,-204.72) T2(-236.22,-204.72) T3(-204.72,-204.72) T4(-173.23,-204.72) T5(-141.73,-204.72) T6(-110.24,-204.72) T7(-78.74,-204.72) T8(-47.24,-204.72) T9(-15.75,-204.72) T10(15.75,-204.72) T11(47.24,-204.72) T12(78.74,-204.72) T13(110.24,-204.72) T14(141.73,-204.72) T15(173.23,-204.72) T16(204.72,-204.72) T17(236.22,-204.72) T18(267.72,-204.72) U1(-267.72,-236.22) U2(-236.22,-236.22) U3(-204.72,-236.22) U4(-173.23,-236.22) U5(-141.73,-236.22) U6(-110.24,-236.22) U7(-78.74,-236.22) U8(-47.24,-236.22) U9(-15.75,-236.22) U10(15.75,-236.22) U11(47.24,-236.22) U12(78.74,-236.22) U13(110.24,-236.22) U14(141.73,-236.22) U15(173.23,-236.22) U16(204.72,-236.22) U17(236.22,-236.22) U18(267.72,-236.22) V1(-267.72,-267.72) V2(-236.22,-267.72) V3(-204.72,-267.72) V4(-173.23,-267.72) V5(-141.73,-267.72) V6(-110.24,-267.72) V7(-78.74,-267.72) V8(-47.24,-267.72) V9(-15.75,-267.72) V10(15.75,-267.72) V11(47.24,-267.72) V12(78.74,-267.72) V13(110.24,-267.72) V14(141.73,-267.72) V15(173.23,-267.72) V16(204.72,-267.72) V17(236.22,-267.72) V18(267.72,-267.72)
  Keep-Out Layer region: -300.96,-300.96 -300.96,300.96 300.96,300.96 300.96,-300.96
  silkscreen extent -306,-306 306,306, body extent -296,-296 296,296, height 59
FP-25536NA6-0 [mm]
  rect 1.7x1.7 hole 1.1 paste-2539.97 mask+0: 1(-5.08,3)
  round 1.7 hole 1.1 paste-2539.97 mask+0: 2(0,3) 3(5.08,3)
  silkscreen extent -7.72,-6.75 7.05,6.75, body extent -7.15,-6.85 7.15,6.85, height 0.25
FP-CDFN2520-4LD-PL-1-MFG [mm]
  rect 0.85x0.65 smd paste+0 mask+0: 1(-0.775,0.825) 2(-0.775,-0.825) 3(0.775,-0.825) 4(0.775,0.825)
  silkscreen extent -1.87,-0.13 1.02,0.95, body extent -1.3,-1.38 1.3,1.38, height 0.25
FP-RGT0016C-IPC_C [mm]
  rect 0.766x0.239 smd paste+0 mask+0: 1(-1.373,0.75)
  rrect100% 0.766x0.239 smd paste+0 mask+0: 2(-1.373,0.25) 3(-1.373,-0.25) 4(-1.373,-0.75) 9(1.373,-0.75) 10(1.373,-0.25) 11(1.373,0.25) 12(1.373,0.75)
  rrect100% 0.239x0.766 smd paste+0 mask+0: 5(-0.75,-1.373) 6(-0.25,-1.373) 7(0.25,-1.373) 8(0.75,-1.373) 13(0.75,1.373) 14(0.25,1.373) 15(-0.25,1.373) 16(-0.75,1.373)
  rect 1.68x1.68 smd paste-1000 mask+0: 17(0,0)
  silkscreen extent -2.37,-1.5 1.5,1.5, body extent -1.86,-1.86 1.86,1.86, height 0.25
JST-B2P-VH(LF)(SN)_V [mm] "THD, 2-Leads, Body 8.5x7.86mm, Pitch 3.96mm"
  rect 2.15x2.15 hole 1.65: 1(-1.98,1.4)
  round 2.15 hole 1.65: 2(1.98,1.4)
  silkscreen extent -4.7,-3.4 3.93,5.1, body extent -3.93,-3.2 3.93,5.3, height 10.9
MICT-SE-8_L [mm] "SOP, 8-Leads, Body 5.5x5.5mm, Pitch 1.27mm, IPC High Density"
  oval 1.4x0.55 smd: 1(-3.5,1.905) 2(-3.5,0.635) 3(-3.5,-0.635) 4(-3.5,-1.905) 5(3.5,-1.905) 6(3.5,-0.635) 7(3.5,0.635) 8(3.5,1.905)
  silkscreen extent -3.62,-2.75 2.4,2.85, body extent -3.95,-2.75 3.95,2.75, height 2.16
RESA60-630X240 [mm] "Axial Resistor, 2-Leads, Dia 2.4mm, Body Length 6.3mm"
  rect 1.35x1.35 hole 0.85: 1(-4.5,0)
  round 1.35 hole 0.85: 2(4.5,0)
  silkscreen extent -3.15,-1.2 3.15,1.2, body extent -4.77,-1.19 4.77,1.2, height 2.4
RESC0402(1005)_L [mm] "Chip Resistor, Body 1.0x0.5mm, IPC High Density"
  rrect25% 0.5x0.55 smd: 1(-0.45,0) 2(0.45,0)
  silkscreen extent 0,-0.2 0,0.2, body extent -0.5,-0.25 0.5,0.25, height 0.3
SUSUMU-PCMB063T_V [mm] "SMD, 2-Leads, Body 7.8x6.7mm"
  rrect8% 2x3.5 smd: 1(-2.95,0) 2(2.95,0)
  silkscreen extent -4.1,-3.5 4.1,3.5, body extent -3.65,-3.4 3.65,3.4, height 3

## Part data
C1 C2 C3 C4 C5 C6 C7 C10 C11 C12 C13 C14 C15 C16 C18 C19 C20 C21 C22 C23 C24 C25 C26 C27 C28 C29 C30 C31 C32 C33 C34 C35 C36 C37 C38 C39 C40 C41 C42 C46 C47 C48 C51 C52 C54 C56 C57 C59 C61 C62 C63 C65 C66: library part CMP-001-00000-6, "Chip Capacitor, 6.8 nF, +/- 10%, 16 V, 0402 (1005 Metric)", Capacitor Type=Ceramic, Case/Package=0402, Max Operating Temperature=125°C, Min Operating Temperature=-55°C, Tolerance=10%, Voltage Rating=16V, Mounting Technology=SM, Pins=2, RoHS Compliant=True
C8 C9 C17 C44 C45 C49 C50 C53 C55 C60 C64: library part CMP-001-00016-6, "Chip Capacitor, 10 uF, +/- 10%, 16 V, 1206 (3216 Metric)", Capacitor Type=Ceramic, Case/Package=1206, Max Operating Temperature=125°C, Min Operating Temperature=-55°C, Tolerance=10%, Voltage Rating=16V, Mounting Technology=SM, Pins=2, RoHS Compliant=True
J1: library part CMP-002-00075-1, "Hd-D Sub Conn, R/A Rcpt, 15Pos, De, Tht Rohs Compliant: Yes", Max Operating Temperature=105°C, Min Operating Temperature=-55°C, Gender=Female, Pins=15
J2: library part CMP-002-00076-1, "Connector Header Surface Mount 10 position 0.050\" (1.27mm)-JTAG Connector", Max Operating Temperature=105°C, Min Operating Temperature=-40°C, Gender=Female, Pins=10
J3: library part CMP-002-00025-2, "Male Header, Pitch 3.96 mm, 1 x 2 Position, Height 10.9 mm, Tail Length 3.7 mm, -25 to 85 degC, RoHS, Bulk", Manufacturer=JST, Max Operating Temperature=85°C, Min Operating Temperature=-25°C, Package Description="Male Header, Pitch 3.96 mm, 1 x 2 Position, Height 10.9 mm, Tail Length 3.7 mm", Case/Package=B2P-VH(LF)(SN), Connector Type=Header, Datasheet URL=http://www.jst-mfg.com/product/pdf/eng/eVH.pdf, Datasheet Version=May-16, Gender=Male, Manufacturer URL=http://www.jst.com/home2.html, Mounting Technology=TH, Package Reference=B2P-VH(LF)(SN), RoHS Compliant=Unknown
L1 L2 L3: library part CMP-006-00019-3, "Shielded Wirewound Inductor, 2.2 uH, +/- 20%, -20 to 120 degC, 2-Pin SMD, RoHS, Tape and Reel", Case/Package=SMD/SMT, Tolerance=20%, Pins=2
R1 R2 R3 R4 R5 R6 R7 R8 R9 R10 R11 R12 R13 R14: library part CMP-009-00056-4, "Axial Resistor, 475 Ohm, +/- 1%, 0.25 W, -55 to 155 degC, 2-Pin THD, RoHS, Bulk", Case/Package=Axial, Manufacturer=Yageo, Max Operating Temperature=155°C, Min Operating Temperature=-55°C, Package Description="2-Pin Axial Lead, Dia 2.4 mm, Body Length 6.3 mm", Package Quantity=200, Package Reference=MFR-25, Power=250mW, Tolerance=1%, Voltage Rating=250V, Datasheet URL=http://www.yageo.com/documents/recent/Yageo%20LR_MFR_2013.pdf, Datasheet Version=Apr-13, Manufacturer URL=http://www.yageo.com/, Mounting Technology=TH, Packaging=Bulk, RoHS Compliant=True
R16 R17 R18 R19 R20 R21 R22 R23 R24 R25 R26 R27 R28 R29 R30 R31 R32 R33: library part CMP-009-00111-2, "84K5 0.063W 1% 0402 (1005 Metric)  SMD", Case/Package=0402, Power=63mW, Tolerance=1%, Mounting Technology=SMT, Pins=2
SW1: library part CMP-47022-000007-1, "SWITCH SLIDE SPDT 4A 125V", Contact Current Rating=4A, Contact Resistance=10mR, Current Rating=1A, Max Operating Temperature=85°C, Max Voltage Rating (AC)=250V, Max Voltage Rating (DC)=30V, Min Operating Temperature=-40°C, Package Quantity=100, Voltage Rating (AC)=125V, Actuator Length=6mm, Actuator Material=Nylon, Actuator Type=Standard, Contact Material=Silver, Contact Plating=Silver, Electrical Life=10000Cycles, Illumination Type=Non-Illuminated, Mechanical Life=20000Cycles, Mount="Through Hole", Orientation="Right Angle", Packaging=Bulk, Series=25000N, Switch Function=On-On, Switch Travel=4mm, Termination="PC Pin", Throw Configuration=SPDT, Voltage Rating (DC)=30V
U1: "IC FPGA ARTIX7 210 I/O 324CSBGA", Manufacturer_Name=AMD, Mouser Part Number=217-C7A100T-1CSG324C, Datasheet Link=http://www.xilinx.com/support/documentation/data_sheets/ds181_Artix_7_Data_Sheet.pdf, Geometry.Height=1.5mm, Manufacturer_Part_Number=XC7A100T-1CSG324C, Mouser Price/Stock=https://www.mouser.co.uk/ProductDetail/Xilinx/XC7A100T-1CSG324C?qs=rrS6PyfT74d56mzbBO3UMQ%3D%3D
U2: library part CMP-2000-07468-1, "Micron Serial NOR Flash Memory, 2.7 to 3.6 V, 128 Mb, -40 to 85 degC, 8-Pin SOP2 (SE), RoHS, Tape and Reel", Manufacturer=Micron, Package Description="8-Pin Small Outline Package, Body 5.285 x 5.285 mm, Pitch 1.27 mm", Package Reference=SE-8, Datasheet URL=https://www.micron.com/~/media/documents/products/data-sheet/nor-flash/serial-nor/mt25q/die-rev-a/mt25q_qlhs_l_128_aba_0.pdf, Datasheet Version="Rev. I , 09/2016", Manufacturer URL=http://www.micron.com/, Mounting Technology=SurfaceMount, RoHSCompliant=true
U3 U4 U5: library part CMP-019-00049-1, "3-V to 17-V, 3-A step-down converter with DCS-control in 3x3 QFN package 16-VQFN -40 to 125", Case/Package=VQFN, Max Operating Temperature=125°C, Max Supply Voltage=17V, Min Operating Temperature=-40°C, Min Supply Voltage=3V, Nominal Supply Current=17µA, Output Current=3A, Output Voltage=6V, Mounting Technology="Surface Mount", Pins=16
X1: library part CMP-00252-66799144-1, "DSC1001DL5-100.0000T Oscillator MEMS 100MHz ±10ppm (Stability) 15pF CMOS 55% 1.8V/2.5V/3.3V Automotive 4-Pin CDFN SMD T/R", Case/Package=SMD/SMT, Frequency=100MHz, Frequency Stability=10ppm, Load Capacitance=15pF, Max Operating Temperature=105°C, Max Supply Current=8.7mA, Max Supply Voltage=3.6V, Min Operating Temperature=-40°C, Min Supply Voltage=1.7V, Operating Supply Voltage=3.3V, Ratings=AEC-Q100, Height=889µm, Length=2.4892mm, Lifecycle Status=Production, Max Duty Cycle=55%, Mount="Standard, Surface Mount", NexarPartId=66799144, RoHS=Compliant, Schedule B="8542390000, 8542390000", Termination=Solder, Width=2.0066mm

## Nets (pads, with @x,y where several pads share a name; then routed paths per layer and width w, separated by ;. In a path a pad name is that pad's centre, name@x,y a point inside that pad or via, vN(x,y) a via of type N, cw(c..) or ccw(c..) an arc to the next point about the centre after c; other vN are vias at no path point)
CLK100MHZ: U1.P17 X1.3
GND: C1.2 C2.2 C3.2 C4.2 C5.2 C6.1 C7.2 C8.2 C9.2 C10.1 C11.1 C12.1 C13.1 C14.1 C15.1 C16.2 C17.2 C18.1 C19.1 C20.1 C21.1 C22.1 C23.1 C24.1 C25.1 C26.1 C27.1 C28.1 C29.2 C30.1 C31.2 C32.2 C33.2 C34.2 C35.2 C36.2 C37.2 C38.2 C39.2 C40.2 C41.2 C42.2 C44.1 C45.1 C46.1 C47.1 C48.1 C49.1 C50.1 C51.1 C52.1 C53.1 C54.1 C55.1 C56.1 C57.1 C59.2 C60.1 C61.2 C62.1 C63.1 C64.2 C65.1 C66.1 J1.4 J1.5 J1.6 J1.7 J1.8 J1.9 J1.10 J1.11 J1.12 J1.15 J1.M1 J1.M2 J2.2 J2.4 J2.6 J2.8 J2.10 J3.2 R20.2 R21.2 R26.2 R29.2 R31.2 SW1.3 U1.A2 U1.A12 U1.B5 U1.B15 U1.C8 U1.C18 U1.D1 U1.D11 U1.E4 U1.E8 U1.E14 U1.F7 U1.F9 U1.F11 U1.F17 U1.G8 U1.G10 U1.G12 U1.H3 U1.H7 U1.H9 U1.H11 U1.H13 U1.J6 U1.J8 U1.J10 U1.J12 U1.J16 U1.K7 U1.K9 U1.K11 U1.L2 U1.L8 U1.L12 U1.M5 U1.M7 U1.M9 U1.M11 U1.M15 U1.N8 U1.N10 U1.N12 U1.N18 U1.P1 U1.R4 U1.R14 U1.T7 U1.T17 U1.U10 U1.V3 U1.V13 U2.4 U3.6 U3.7 U3.8 U3.15 U3.16 U3.17 U4.6 U4.7 U4.8 U4.15 U4.16 U4.17 U5.6 U5.7 U5.8 U5.15 U5.16 U5.17 X1.2
HSYNC: R13.1 U1.H16
NetR19_1: R19.1 U1.P12
NetR20_1: R20.1 U1.P13
NetR21_1: R21.1 U1.P11
NetR22_1: R22.1 U1.P9
NetR23_1: R23.1 U1.P7
NetR24_1: R24.1 U1.P10
QSPI_CCLK: U1.E9 U2.6
QSPI_CS_B: R16.1 U1.L13 U2.1
QSPI_DQ0: U1.K17 U2.5
QSPI_DQ1: U1.K18 U2.2
QSPI_DQ2: R17.2 U1.L14 U2.3
QSPI_DQ3: R18.2 U1.M14 U2.7
SW0: SW1.2 U1.F15
TCK: C1.1 C18.2 C19.2 C20.2 C21.2 C22.2 C23.2 C24.2 C25.2 C26.2 C27.2 C28.2 C29.1 C30.2 C31.1 C32.1 C33.1 C34.1 C35.1 C36.1 C37.1 C38.1 C39.1 C40.1 C41.1 C42.1 C53.2 C57.2 C59.1 C61.1 J2.1 L3.2 R16.2 R17.1 R18.1 R19.2 R22.2 R23.2 R24.2 R32.1 R33.2 SW1.1 U1.A7 U1.A17 U1.B10 U1.C3 U1.C13 U1.D6 U1.D16 U1.E10 U1.F2 U1.G5 U1.G15 U1.H18 U1.J1 U1.K4 U1.K14 U1.L17 U1.N3 U1.N13 U1.P6 U1.P8 U1.P16 U1.R9 U1.T2 U1.T12 U1.U5 U1.U15 U1.V8 U1.V18 U2.8 U5.14 X1.1 X1.4
TDI: J2.5 U1.E11
TDO: J2.3 U1.E13
TMS: J2.7 U1.E12
VCCAUX_1V8: C15.2 C16.1 C17.1 C50.2 C51.2 C66.2 L2.2 R28.1 R30.2 U1.F12 U1.H10 U1.H12 U1.K12 U1.M12 U4.14
VCCAUX_FB: R28.2 R29.1 U4.5
VCCAUX_PG: R30.1 U4.4
VCCAUX_SS: C52.2 U4.9
VCCAUX_SW: L2.1 U4.1 U4.2 U4.3
VCCINT_1V0: C2.1 C3.1 C4.1 C5.1 C6.2 C7.1 C8.1 C9.1 C10.2 C11.2 C12.2 C13.2 C14.2 C45.2 C46.2 C60.2 C63.2 L1.2 R25.1 R27.2 U1.F8 U1.F10 U1.G7 U1.G9 U1.G11 U1.H8 U1.J7 U1.J11 U1.K8 U1.L7 U1.L11 U1.M8 U1.M10 U1.N7 U1.N9 U1.N11 U3.14
VCCINT_FB: R25.2 R26.1 U3.5
VCCINT_PG: R27.1 U3.4
VCCINT_SS: C47.2 U3.9
VCCINT_SW: L1.1 U3.1 U3.2 U3.3
VCCO_FB: R31.1 R32.2 U5.5
VCCO_PG: R33.1 U5.4
VCCO_SS: C56.2 U5.9
VCCO_SW: L3.1 U5.1 U5.2 U5.3
VGA_B0: R9.1 U1.E15
VGA_B1: R10.1 U1.C15
VGA_B2: R11.1 U1.D15
VGA_B3: R12.1 U1.G16
VGA_B_ANALOG: J1.3 R9.2 R10.2 R11.2 R12.2
VGA_G0: R5.1 U1.E18
VGA_G1: R6.1 U1.G13
VGA_G2: R7.1 U1.K16
VGA_G3: R8.1 U1.E16
VGA_G_ANALOG: J1.2 R5.2 R6.2 R7.2 R8.2
VGA_HSYNC: J1.13 R13.2
VGA_R0: R1.1 U1.A11
VGA_R1: R2.1 U1.B11
VGA_R2: R3.1 U1.D12
VGA_R3: R4.1 U1.H14
VGA_R_ANALOG: J1.1 R1.2 R2.2 R3.2 R4.2
VGA_VSYNC: J1.14 R14.2
VIN: C44.2 C48.2 C49.2 C54.2 C55.2 C62.2 C64.1 C65.2 J3.1 U3.10 U3.11 U3.12 U3.13 U4.10 U4.11 U4.12 U4.13 U5.10 U5.11 U5.12 U5.13
VSYNC: R14.1 U1.F16
pads on no net: J2.9 U1.A1 U1.A3 U1.A4 U1.A5 U1.A6 U1.A8 U1.A9 U1.A10 U1.A13 U1.A14 U1.A15 U1.A16 U1.A18 U1.B1 U1.B2 U1.B3 U1.B4 U1.B6 U1.B7 U1.B8 U1.B9 U1.B12 U1.B13 U1.B14 U1.B16 U1.B17 U1.B18 U1.C1 U1.C2 U1.C4 U1.C5 U1.C6 U1.C7 U1.C9 U1.C10 U1.C11 U1.C12 U1.C14 U1.C16 U1.C17 U1.D2 U1.D3 U1.D4 U1.D5 U1.D7 U1.D8 U1.D9 U1.D10 U1.D13 U1.D14 U1.D17 U1.D18 U1.E1 U1.E2 U1.E3 U1.E5 U1.E6 U1.E7 U1.E17 U1.F1 U1.F3 U1.F4 U1.F5 U1.F6 U1.F13 U1.F14 U1.F18 U1.G1 U1.G2 U1.G3 U1.G4 U1.G6 U1.G14 U1.G17 U1.G18 U1.H1 U1.H2 U1.H4 U1.H5 U1.H6 U1.H15 U1.H17 U1.J2 U1.J3 U1.J4 U1.J5 U1.J9 U1.J13 U1.J14 U1.J15 U1.J17 U1.J18 U1.K1 U1.K2 U1.K3 U1.K5 U1.K6 U1.K10 U1.K13 U1.K15 U1.L1 U1.L3 U1.L4 U1.L5 U1.L6 U1.L9 U1.L10 U1.L15 U1.L16 U1.L18 U1.M1 U1.M2 U1.M3 U1.M4 U1.M6 U1.M13 U1.M16 U1.M17 U1.M18 U1.N1 U1.N2 U1.N4 U1.N5 U1.N6 U1.N14 U1.N15 U1.N16 U1.N17 U1.P2 U1.P3 U1.P4 U1.P5 U1.P14 U1.P15 U1.P18 U1.R1 U1.R2 U1.R3 U1.R5 U1.R6 U1.R7 U1.R8 U1.R10 U1.R11 U1.R12 U1.R13 U1.R15 U1.R16 U1.R17 U1.R18 U1.T1 U1.T3 U1.T4 U1.T5 U1.T6 U1.T8 U1.T9 U1.T10 U1.T11 U1.T13 U1.T14 U1.T15 U1.T16 U1.T18 U1.U1 U1.U2 U1.U3 U1.U4 U1.U6 U1.U7 U1.U8 U1.U9 U1.U11 U1.U12 U1.U13 U1.U14 U1.U16 U1.U17 U1.U18 U1.V1 U1.V2 U1.V4 U1.V5 U1.V6 U1.V7 U1.V9 U1.V10 U1.V11 U1.V12 U1.V14 U1.V15 U1.V16 U1.V17

## Polygon pours and split planes (outlines as drawn)
no net on GND Plane (split plane): 6979.9,1020.1 1020.1,1020.1 1020.1,4979.9 6979.9,4979.9
no net on Power Plane (split plane): 6979.9,1020.1 1020.1,1020.1 1020.1,4979.9 6979.9,4979.9
no net on Inner Signal (split plane): 6979.9,1020.1 1020.1,1020.1 1020.1,4979.9 6979.9,4979.9
no net on GND Plane 2 (split plane): 6979.9,1020.1 1020.1,1020.1 1020.1,4979.9 6979.9,4979.9

## Text inside footprints (layer, text, board x,y; h text height)
J1: Assembly Notes "PCB Edge" at 6804.96,3762.32 h40 r90
U1: Top Overlay "REFDES" at 3635.73,2893.78 h50; Top Overlay "RefDes" at 3648.23,2893.78 h50; Top Overlay "18" at 4015.94,3239.28 h50 r90; Top Overlay "1" at 3480.51,3239.28 h50 r90; Top Overlay "V" at 3377.73,2626.06 h50; Top Overlay "A" at 3377.73,3161.5 h50; Mechanical 13 "RefDes2" at 3635.73,2893.78 h50; Mechanical 13 "18" at 4015.94,3239.28 h50 r90; Mechanical 13 "1" at 3480.51,3239.28 h50 r90; Mechanical 13 "V" at 3377.73,2626.06 h50; Mechanical 13 "A" at 3377.73,3161.5 h50; Bottom Overlay "18" at 3965.94,3239.28 h50 r270; Bottom Overlay "1" at 3430.51,3239.28 h50 r270; Bottom Overlay "V" at 3402.73,2626.06 h50; Bottom Overlay "A" at 3402.73,3161.5 h50